# EAGLE board CT_schematic (EAGLE 7.6.0)

Size 100 x 80 mm. Coordinates in mm from the lower left corner, seen from the top.
Outline: 0,0 100,0 100,80 0,80 0,0
Copper layers (1*16): Top 0.035mm / dielectric 1.5mm / Bottom 0.035mm
Design rules "default": minimum track width 10mil, minimum drill 24mil, track to track 8mil, track to pad 8mil, pad to pad 8mil, via to via 8mil, smd to smd 8mil, copper to edge 40mil, drill to drill 8mil, minimum pad ring 10mil, minimum via ring 8mil, stop-mask expansion 4mil, vias tented up to drill 0mil, thermal gap 10mil

## Footprints (pad centres in the part's own frame; a part is rotated, then mirrored left to right if it is on the bottom)
C0603 = smd 0.8 x 0.8: 1 -0.762,0; 2 0.762,0
C0402 = smd 0.5 x 0.5: 1 -0.508,0; 2 0.508,0
C0805 = smd 1.2 x 1.3: 1 -1.016,0; 2 1.016,0
C1210 = smd 1.2 x 2.5: 1 -1.524,0; 2 1.524,0
C1206 = smd 1.3 x 1.6: 1 -1.524,0; 2 1.524,0
EXV-9H = smd 3.505 x 1.676: 1 -2.857,0; 2 2.857,0
L0603 = smd 0.8 x 0.8: 1 -0.762,0; 2 0.762,0
PJ-037B_PACKAGE = drill 3.7 square: 1 12,0 | drill 3.2 square: 2 6,0
R0603 = smd 0.8 x 0.8: 1 -0.762,0; 2 0.762,0
LQFP144 = smd 0.35 x 1.35: 1 -8.75,-10.625; 2 -8.25,-10.625; 3 -7.75,-10.625; 4 -7.25,-10.625; 5 -6.75,-10.625; 6 -6.25,-10.625; 7 -5.75,-10.625; 8 -5.25,-10.625; 9 -4.75,-10.625; 10 -4.25,-10.625; 11 -3.75,-10.625; 12 -3.25,-10.625; 13 -2.75,-10.62; 14 -2.25,-10.625; 15 -1.75,-10.625; 16 -1.25,-10.625; 17 -0.75,-10.625; 18 -0.25,-10.625; 19 0.25,-10.625; 20 0.75,-10.625; 21 1.25,-10.625; 22 1.75,-10.625; 23 2.25,-10.625; 24 2.75,-10.62; 25 3.25,-10.625; 26 3.75,-10.625; 27 4.25,-10.625; 28 4.75,-10.625; 29 5.25,-10.625; 30 5.75,-10.625; 31 6.25,-10.625; 32 6.75,-10.625; 33 7.25,-10.625; 34 7.75,-10.625; 35 8.25,-10.625; 36 8.75,-10.625; 73 8.75,10.625; 74 8.25,10.625; 75 7.75,10.625; 76 7.25,10.625; 77 6.75,10.625; 78 6.25,10.625; 79 5.75,10.625; 80 5.25,10.625; 81 4.75,10.625; 82 4.25,10.625; 83 3.75,10.625; 84 3.25,10.625; 85 2.75,10.625; 86 2.25,10.625; 87 1.75,10.625; 88 1.25,10.625; 89 0.75,10.625; 90 0.25,10.625; 91 -0.25,10.625; 92 -0.75,10.625; 93 -1.25,10.625; 94 -1.75,10.625; 95 -2.25,10.625; 96 -2.75,10.625; 97 -3.25,10.625; 98 -3.75,10.625; 99 -4.25,10.625; 100 -4.75,10.625; 101 -5.25,10.625; 102 -5.75,10.625; 103 -6.25,10.625; 104 -6.75,10.625; 105 -7.25,10.625; 106 -7.75,10.625; 107 -8.25,10.625; 108 -8.75,10.625 | smd 1.35 x 0.35: 37 10.625,-8.75; 38 10.625,-8.25; 39 10.625,-7.75; 40 10.625,-7.25; 41 10.625,-6.75; 42 10.625,-6.25; 43 10.625,-5.75; 44 10.625,-5.25; 45 10.625,-4.75; 46 10.625,-4.25; 47 10.625,-3.75; 48 10.625,-3.25; 49 10.625,-2.75; 50 10.625,-2.25; 51 10.625,-1.75; 52 10.625,-1.25; 53 10.625,-0.75; 54 10.625,-0.25; 55 10.625,0.25; 56 10.625,0.75; 57 10.625,1.25; 58 10.625,1.75; 59 10.625,2.25; 60 10.625,2.75; 61 10.625,3.25; 62 10.625,3.75; 63 10.625,4.25; 64 10.625,4.75; 65 10.625,5.25; 66 10.625,5.75; 67 10.625,6.25; 68 10.625,6.75; 69 10.625,7.25; 70 10.625,7.75; 71 10.625,8.25; 72 10.625,8.75; 109 -10.625,8.75; 110 -10.625,8.25; 111 -10.625,7.75; 112 -10.625,7.25; 113 -10.625,6.75; 114 -10.625,6.25; 115 -10.625,5.75; 116 -10.625,5.25; 117 -10.625,4.75; 118 -10.625,4.25; 119 -10.625,3.75; 120 -10.625,3.25; 121 -10.625,2.75; 122 -10.625,2.25; 123 -10.625,1.75; 124 -10.625,1.25; 125 -10.625,0.75; 126 -10.625,0.25; 127 -10.625,-0.25; 128 -10.625,-0.75; 129 -10.625,-1.25; 130 -10.625,-1.75; 131 -10.625,-2.25; 132 -10.625,-2.75; 133 -10.625,-3.25; 134 -10.625,-3.75; 135 -10.625,-4.25; 136 -10.625,-4.75; 137 -10.625,-5.25; 138 -10.625,-5.75; 139 -10.625,-6.25; 140 -10.625,-6.75; 141 -10.625,-7.25; 142 -10.625,-7.75; 143 -10.625,-8.25; 144 -10.625,-8.75
SOIC-8 = smd 1.6 x 0.6: 1 -2.7,1.905 | smd 1.55 x 0.6: 2 -2.7,0.635; 3 -2.7,-0.635; 4 -2.7,-1.905; 5 2.7,-1.905; 6 2.7,-0.635; 7 2.7,0.635; 8 2.7,1.905
10100565 = smd 0.8 x 2.35: 1 0,0; 2 1.25,0; 3 2.55,0; 4 4.25,0; 5 5.43,0; 6 6.68,0; 7 7.93,0; 8 9.18,0; 9 11.67,0; 10 14.18,0; 11 15.43,0; 12 16.68,0; 13 17.93,0; 14 19.18,0; 15 21.68,0 | smd 1.5 x 3.1: 16 23.495,-1.375; 20 25.685,-22.875 | smd 1.55 x 3.1: 17 -1.815,-1.375; 21 -1.815,-22.875 | drill 1.1 pad 1.1: 18 21.68,-2.375; 19 0.68,-2.375
TDFN-8/6MM = smd 0.3 x 0.75: 1 0,0; 2 0.5,0; 3 1,0; 4 1.5,0; 5 1.5,3; 6 1,3; 7 0.5,3; 8 0,3
182-009-MALE = drill 1.194 pad 1.524 octagon: 1 -5.537,10.923; 2 -2.769,10.923; 3 0,10.923; 4 2.769,10.923; 5 5.537,10.923; 6 -4.153,8.08; 7 -1.384,8.08; 8 1.384,8.08; 9 4.153,8.08 | hole 3.048: -12.446,9.501; 12.446,9.501
QFN-28 = smd 0.813 x 0.305: 1 -2.451,1.5; 2 -2.451,1; 3 -2.451,0.5; 4 -2.451,0; 5 -2.451,-0.5; 6 -2.451,-1; 7 -2.451,-1.5; 15 2.451,-1.5; 16 2.451,-1; 17 2.451,-0.5; 18 2.451,0; 19 2.451,0.5; 20 2.451,1; 21 2.451,1.5 | smd 0.305 x 0.813: 8 -1.5,-2.451; 9 -1,-2.451; 10 -0.5,-2.451; 11 0,-2.451; 12 0.5,-2.451; 13 1,-2.451; 14 1.5,-2.451; 22 1.5,2.451; 23 1,2.451; 24 0.5,2.451; 25 0,2.451; 26 -0.5,2.451; 27 -1,2.451; 28 -1.5,2.451 | smd 3.607 x 3.607: 29 0,0
SJ-43515TS-SMT-TR = smd 2.2 x 3: 1 0.6,-7.4; 4 3.4,-7.4 | smd 3 x 3: 2 12.8,-7.4; 5 17,-3 | smd 2 x 3: 3 5.3,0; 6 2.5,0 | drill 1.8: P$7 4.5,-3.69; P$8 11.54,-3.69
ABS07-32.768KHZ-7-T = smd 1.1 x 2.4: 1 -2.5,0; 2 0,0
ABLS-12.288MHZ-B4-T = smd 5.6 x 2.8: 1 -3.81,0; 2 5.69,0
ASFL1 = smd 1.7 x 1.5: 1 -1.27,-1.1; 2 1.27,-1.1; 3 1.27,1.1; 4 -1.27,1.1
WSON-8 = smd 0.3 x 0.6: 1 -0.75,0; 2 0.05,0; 3 0.85,0; 4 1.65,0; 5 1.65,3.8; 6 0.85,3.8; 7 0.05,3.8; 8 -0.75,3.8 | smd 3 x 2.6: PAD 0.45,1.9
SON-6 = smd 0.55 x 0.3: 1 -0.355,0.5 | smd 0.52 x 0.3: 2 -0.37,0; 3 -0.37,-0.5; 4 0.37,-0.5; 5 0.37,0; 6 0.37,0.5
SW_4-1437565-2 = smd 1.4 x 2.1: 1 -2.23,4.55; 2 -2.23,-4.55; 3 2.23,4.55; 4 2.23,-4.55
LGM67K-G1J2-24-Z = smd 0.8 x 1.4: A -2,0; C 0,0
NC7SZ125M5X = smd 1.3 x 0.7: 1 -1.3,0.95; 2 -1.3,0; 3 -1.3,-0.95; 4 1.3,-0.95; 5 1.3,0.95

## Placement (x,y rotation side)
C1  1e-06  [C0603]  -45.72,97.79 0 top  (outside the outline)
C2  1e-07  [C0603]  -49.53,97.79 0 top  (outside the outline)
C3  1e-07  [C0603]  -53.34,97.79 0 top  (outside the outline)
C4  1e-07  [C0603]  -57.15,97.79 0 top  (outside the outline)
C5  1e-07  [C0603]  -60.96,97.79 0 top  (outside the outline)
C6  1e-07  [C0603]  -64.77,97.79 0 top  (outside the outline)
C7  1e-07  [C0603]  -68.58,97.79 0 top  (outside the outline)
C8  1e-07  [C0603]  -72.39,97.79 0 top  (outside the outline)
C9  1e-07  [C0603]  -76.2,97.79 0 top  (outside the outline)
C10  1e-07  [C0603]  -80.01,97.79 0 top  (outside the outline)
C11  1e-07  [C0603]  -83.82,97.79 0 top  (outside the outline)
C12  1e-07  [C0603]  -87.63,97.79 0 top  (outside the outline)
C13  1e-07  [C0603]  -91.44,97.79 0 top  (outside the outline)
C14  4.7e-06  [C0603]  -34.29,97.79 0 top  (outside the outline)
C15  2.2e-06  [C0603]  -38.1,97.79 0 top  (outside the outline)
C16  2.2e-06  [C0603]  -41.91,97.79 0 top  (outside the outline)
C17  1e-08  [C0603]  -15.24,102.87 0 top  (outside the outline)
C18  1e-06  [C0603]  -19.05,102.87 0 top  (outside the outline)
C19  1e-11  [C0402]  -69.85,102.87 0 top  (outside the outline)
C20  1e-11  [C0402]  -73.66,102.87 0 top  (outside the outline)
C21  1e-08  [C0402]  -77.47,102.87 0 top  (outside the outline)
C22  1e-07  [C0402]  -81.28,102.87 0 top  (outside the outline)
C23  1e-05  [C0805]  -40.64,86.36 0 top  (outside the outline)
C24  1e-08  [C0402]  -85.09,102.87 0 top  (outside the outline)
C25  1e-07  [C0402]  -88.9,102.87 0 top  (outside the outline)
C26  2.2e-05  [C1210]  -87.63,78.74 0 top  (outside the outline)
C27  2.2e-05  [C1210]  -16.51,87.63 0 top  (outside the outline)
C28  1e-09  [C0402]  -92.71,102.87 0 top  (outside the outline)
C29  1e-09  [C0402]  -15.24,107.95 0 top  (outside the outline)
C30  1e-07  [C0402]  -19.05,107.95 0 top  (outside the outline)
C31  1e-07  [C0402]  -22.86,107.95 0 top  (outside the outline)
C32  1e-07  [C0402]  -26.67,107.95 0 top  (outside the outline)
C33  1e-07  [C0402]  -30.48,107.95 0 top  (outside the outline)
C34  1e-07  [C0402]  -34.29,107.95 0 top  (outside the outline)
C35  1e-05  [C0805]  -45.72,86.36 0 top  (outside the outline)
C36  1e-05  [C0805]  -50.8,86.36 0 top  (outside the outline)
C37  1e-05  [C0805]  -55.88,86.36 0 top  (outside the outline)
C38  1e-05  [C0805]  -60.96,86.36 0 top  (outside the outline)
C39  1e-05  [C0805]  -66.04,86.36 0 top  (outside the outline)
C40  2.2e-11  [C0402]  -62.23,102.87 0 top  (outside the outline)
C41  2.2e-11  [C0402]  -66.04,102.87 0 top  (outside the outline)
C42  1e-08  [C0402]  -38.1,107.95 0 top  (outside the outline)
C43  1e-08  [C0402]  -41.91,107.95 0 top  (outside the outline)
C44  1e-05  [C1206]  -29.21,86.36 0 top  (outside the outline)
C45  1e-05  [C1210]  -22.86,87.63 0 top  (outside the outline)
C46  1e-07  [C0402]  -45.72,107.95 0 top  (outside the outline)
C47  0.0001  [EXV-9H]  -85.09,69.85 0 top  (outside the outline)
C48  0.0001  [EXV-9H]  -17.78,80.01 0 top  (outside the outline)
C49  1e-08  [C0402]  -49.53,107.95 0 top  (outside the outline)
F1  240.0  [L0603]  -22.86,102.87 0 top  (outside the outline)
J1  PJ-037B  [PJ-037B_PACKAGE]  -55.88,58.42 0 top  (outside the outline)
R2  1000.0  [R0603]  -26.67,102.87 0 top  (outside the outline)
R4  4700.0  [R0603]  -30.48,102.87 0 top  (outside the outline)
R5  2200.0  [R0603]  -34.29,102.87 0 top  (outside the outline)
R6  2200.0  [R0603]  -38.1,102.87 0 top  (outside the outline)
R7  10000.0  [R0603]  -66.04,92.71 0 top  (outside the outline)
R8  10000.0  [R0603]  -71.12,92.71 0 top  (outside the outline)
R9  10000.0  [R0603]  -76.2,92.71 0 top  (outside the outline)
R10  10000.0  [R0603]  -81.28,92.71 0 top  (outside the outline)
R11  10000.0  [R0603]  -86.36,92.71 0 top  (outside the outline)
R12  100000.0  [R0603]  -71.12,86.36 0 top  (outside the outline)
R13  100000.0  [R0603]  -76.2,86.36 0 top  (outside the outline)
R14  100000.0  [R0603]  -81.28,86.36 0 top  (outside the outline)
R15  100000.0  [R0603]  -86.36,86.36 0 top  (outside the outline)
R16  100000.0  [R0603]  -91.44,86.36 0 top  (outside the outline)
R17  100000.0  [R0603]  -15.24,92.71 0 top  (outside the outline)
R18  100000.0  [R0603]  -20.32,92.71 0 top  (outside the outline)
R19  100000.0  [R0603]  -25.4,92.71 0 top  (outside the outline)
R20  100000.0  [R0603]  -30.48,92.71 0 top  (outside the outline)
R21  100000.0  [R0603]  -35.56,92.71 0 top  (outside the outline)
R22  100000.0  [R0603]  -40.64,92.71 0 top  (outside the outline)
R23  120.0  [R0603]  -41.91,102.87 0 top  (outside the outline)
R24  470000.0  [R0603]  -45.72,92.71 0 top  (outside the outline)
R25  47000.0  [R0603]  -91.44,92.71 0 top  (outside the outline)
R26  47000.0  [R0603]  -15.24,97.79 0 top  (outside the outline)
R27  47000.0  [R0603]  -20.32,97.79 0 top  (outside the outline)
R28  680.0  [R0603]  -45.72,102.87 0 top  (outside the outline)
R29  100000.0  [R0603]  -50.8,92.71 0 top  (outside the outline)
R30  2231.0  [R0603]  -49.53,102.87 0 top  (outside the outline)
R31  1000.0  [R0603]  -53.34,102.87 0 top  (outside the outline)
R32  10000.0  [R0603]  -25.4,97.79 0 top  (outside the outline)
R33  10000.0  [R0603]  -30.48,97.79 0 top  (outside the outline)
R34  9100.0  [R0603]  -57.15,102.87 0 top  (outside the outline)
R35  680000.0  [R0603]  -55.88,92.71 0 top  (outside the outline)
R36  120000.0  [R0603]  -60.96,92.71 0 top  (outside the outline)
U1  stm32f405ZGT6  [LQFP144]  -55.88,11.43 0 top  (outside the outline)
U2  AT25020B-SSHL-T  [SOIC-8]  -24.13,71.12 0 top  (outside the outline)
U3  10100565  [10100565]  -40.64,25.4 0 top  (outside the outline)
U4  24AA16-I/MC  [TDFN-8/6MM]  -86.36,55.88 0 top  (outside the outline)
U5  SN65HVD230D  [SOIC-8]  -38.1,71.12 0 top  (outside the outline)
U6  182-009-113R531  [182-009-MALE]  -36.83,35.56 0 top  (outside the outline)
U7  WM8731CLSEFL  [QFN-28]  -80.01,80.01 0 top  (outside the outline)
U8  SJ-43515TS-SMT-TR  [SJ-43515TS-SMT-TR]  -78.74,39.37 0 top  (outside the outline)
U9  SJ-43515TS-SMT-TR  [SJ-43515TS-SMT-TR]  -39.37,60.96 0 top  (outside the outline)
U10  ABS07-32.768KHZ-7-T  [ABS07-32.768KHZ-7-T]  -58.42,80.01 0 top  (outside the outline)
U11  ABLS-12.288MHZ-B4-T  [ABLS-12.288MHZ-B4-T]  -35.56,80.01 0 top  (outside the outline)
U12  ASFL1-25MHZ-NCS  [ASFL1]  -76.2,71.12 0 top  (outside the outline)
U13  LP3878SDX-ADJ/NOPB  [WSON-8]  -59.69,68.58 0 top  (outside the outline)
U14  TPS3895ADRYR  [SON-6]  -52.07,106.68 0 top  (outside the outline)
U15  4-1437565-2  [SW_4-1437565-2]  -72.39,57.15 0 top  (outside the outline)
U16  Q65110A2395  [LGM67K-G1J2-24-Z]  -67.31,78.74 0 top  (outside the outline)
U17  nc7sz125m5x  [NC7SZ125M5X]  -34.29,86.36 0 top  (outside the outline)

## Library data of the parts
C1-C49 F1 J1 R2 R4-R36 U1-U17 = circuit_tree

## Nets
CLK_CRYSTAL_U1_8: C19.1 U1.8 U10.1
CLK_CRYSTAL_U1_9: C20.1 U1.9 U10.2
CLK_CRYSTAL_U7_1: C40.1 U7.1 U11.1
CLK_CRYSTAL_U7_2: C41.1 U7.2 U11.2
CLK_U1_23: U1.23 U12.3
GND: C1.2 C2.2 C3.2 C4.2 C5.2 C6.2 C7.2 C8.2 C9.2 C10.2 C11.2 C12.2 C13.2 C14.2 C15.2 C16.2 C17.2 C18.2 C19.2 C20.2 C21.2 C22.2 C23.2 C24.2 C25.2 C29.2 C30.2 C31.2 C32.2 C33.2 C34.2 C35.2 C36.2 C37.2 C38.2 C39.2 C40.2 C41.2 C42.2 C43.2 C44.2 C45.2 C46.2 C47.2 C48.2 C49.2 J1.2 R2.2 R8.2 R24.2 R25.2 R26.2 R27.2 R31.2 R34.2 R36.2 U1.16 U1.31 U1.38 U1.51 U1.61 U1.83 U1.94 U1.107 U1.120 U1.130 U2.4 U3.6 U3.10 U3.12 U3.16 U3.17 U3.20 U3.21 U4.4 U5.2 U6.5 U7.4 U7.15 U7.19 U7.25 U7.26 U7.29 U8.1 U9.1 U12.2 U13.3 U13.PAD U14.2 U16.C U17.1 U17.3
NET_U1_25: R4.1 U1.25 U17.4
NET_U1_33: C17.1 C18.1 F1.1 U1.32 U1.33
NET_U1_71: C15.1 U1.71
NET_U1_106: C16.1 U1.106
NET_U1_136: R5.1 U1.136 U4.6
NET_U1_137: R6.1 U1.137 U4.5
NET_U1_138: R8.1 U1.138
NET_U1_141: U16.A
NET_U1_142: U15.3 U15.4
NET_U1_143: R7.1 U1.143
NET_U2_3: R9.1 U2.3
NET_U2_7: R11.1 U2.7
NET_U3_1: R14.1 U3.1
NET_U3_2: R13.1 U3.2
NET_U3_18: U3.18 U3.19
NET_U5_6: R23.2 U5.6
NET_U5_8: R24.1 U5.8
NET_U6_2: R23.2 U5.6 U6.2
NET_U6_3: R23.1 U5.7 U6.3
NET_U7_9: U7.9
NET_U7_20: C34.1 C39.1 U7.20
NET_U8_2: C27.1 R26.1 U8.2
NET_U8_5: C26.1 R25.1 U8.5
NET_U8_13: C26.2
NET_U8_14: C27.2
NET_U9_5: C28.1 C29.1 R27.1 R28.1 U9.5
NET_U9_21: R28.2
NET_U9_22: C28.2
NET_U13_1: C43.1 U13.1
NET_U13_6: R30.2 R31.1 U13.6
NET_U13_8: R29.1 U13.8
NET_U14_1: R33.1 R34.1 U14.1
NET_U14_3: R35.2 R36.1 U14.3
NET_U14_4: R32.1 U14.4 U17.2
NET_U15_1: R2.1 U15.1 U15.2
PROC_CAN1_RX: U1.103 U5.4
PROC_CAN1_TX: U1.104 U5.1
PROC_I2S2_CK: U1.69 U7.7
PROC_I2S2_EXT_SD: U1.28 U7.10
PROC_I2S2_SD: U1.29 U7.8
PROC_I2S2_WS: U1.73 U7.9 U7.11
PROC_SDIO_CK: R12.1 U1.113 U3.8
PROC_SDIO_D0: R15.1 U1.98 U3.4
PROC_SDIO_D1: R16.1 U1.99 U3.3
PROC_SDIO_D2: R17.1 U1.111 U3.15
PROC_SDIO_D3: R18.1 U1.112 U3.14
PROC_SDIO_D4: R19.1 U1.139 U3.13
PROC_SDIO_D5: R20.1 U1.140 U3.11
PROC_SDIO_D6: R21.1 U1.96 U3.7
PROC_SDIO_D7: R22.1 U1.97 U3.5
PROC_SPI1_MISO: U1.42 U2.2
PROC_SPI1_MOSI: U1.43 U2.5
PROC_SPI1_NSS: R10.1 U1.40 U2.1
PROC_SPI1_SCK: U1.41 U2.6
VCC_S1_7V3: C44.1 C47.1 C48.1 J1.1 R29.2 U13.4
VCC_TIER1_3V3: C1.1 C2.1 C3.1 C4.1 C5.1 C6.1 C7.1 C8.1 C9.1 C10.1 C11.1 C12.1 C13.1 C14.1 C21.1 C22.1 C23.1 C24.1 C25.1 C30.1 C31.1 C32.1 C33.1 C35.1 C36.1 C37.1 C38.1 C42.1 C45.1 C46.1 C49.1 F1.2 R4.2 R5.2 R6.2 R7.2 R9.2 R10.2 R11.2 R12.2 R13.2 R14.2 R15.2 R16.2 R17.2 R18.2 R19.2 R20.2 R21.2 R22.2 R30.1 R32.2 R33.2 R35.1 U1.6 U1.17 U1.30 U1.39 U1.52 U1.62 U1.72 U1.84 U1.95 U1.108 U1.121 U1.131 U1.144 U2.8 U3.9 U4.7 U4.8 U5.3 U7.3 U7.5 U7.12 U7.18 U12.4 U13.5 U14.6 U17.5

## Tracks (layer width: path | path; a pad name or v marks a point on that pad's centre or on a via)
CLK_CRYSTAL_U1_8  (2 unrouted)
CLK_CRYSTAL_U1_9  (2 unrouted)
CLK_CRYSTAL_U7_1  (2 unrouted)
CLK_CRYSTAL_U7_2  (2 unrouted)
CLK_U1_23  (1 unrouted)
GND  (91 unrouted)
NET_U1_25  (2 unrouted)
NET_U1_33  (4 unrouted)
NET_U1_71  (1 unrouted)
NET_U1_106  (1 unrouted)
NET_U1_136  (2 unrouted)
NET_U1_137  (2 unrouted)
NET_U1_138  (1 unrouted)
NET_U1_142  (1 unrouted)
NET_U1_143  (1 unrouted)
NET_U2_3  (1 unrouted)
NET_U2_7  (1 unrouted)
NET_U3_1  (1 unrouted)
NET_U3_2  (1 unrouted)
NET_U3_18  (1 unrouted)
NET_U5_6  (1 unrouted)
NET_U5_8  (1 unrouted)
NET_U6_2  (2 unrouted)
NET_U6_3  (2 unrouted)
NET_U7_20  (2 unrouted)
NET_U8_2  (2 unrouted)
NET_U8_5  (2 unrouted)
NET_U9_5  (4 unrouted)
NET_U13_1  (1 unrouted)
NET_U13_6  (2 unrouted)
NET_U13_8  (1 unrouted)
NET_U14_1  (2 unrouted)
NET_U14_3  (2 unrouted)
NET_U14_4  (2 unrouted)
NET_U15_1  (2 unrouted)
PROC_CAN1_RX  (1 unrouted)
PROC_CAN1_TX  (1 unrouted)
PROC_I2S2_CK  (1 unrouted)
PROC_I2S2_EXT_SD  (1 unrouted)
PROC_I2S2_SD  (1 unrouted)
PROC_I2S2_WS  (2 unrouted)
PROC_SDIO_CK  (2 unrouted)
PROC_SDIO_D0  (2 unrouted)
PROC_SDIO_D1  (2 unrouted)
PROC_SDIO_D2  (2 unrouted)
PROC_SDIO_D3  (2 unrouted)
PROC_SDIO_D4  (2 unrouted)
PROC_SDIO_D5  (2 unrouted)
PROC_SDIO_D6  (2 unrouted)
PROC_SDIO_D7  (2 unrouted)
PROC_SPI1_MISO  (1 unrouted)
PROC_SPI1_MOSI  (1 unrouted)
PROC_SPI1_NSS  (2 unrouted)
PROC_SPI1_SCK  (1 unrouted)
VCC_S1_7V3  (5 unrouted)
VCC_TIER1_3V3  (79 unrouted)